# Altium PCB LC_LPF6.PcbDoc
Units mil, origin at the board's own origin, x right, y up, seen from the top; angles counter-clockwise.
Board outline 4630 x 1920 mil, 2 copper layers (Top Layer, Bottom Layer); 7 components, 3 nets, 14 pads, 0 vias.
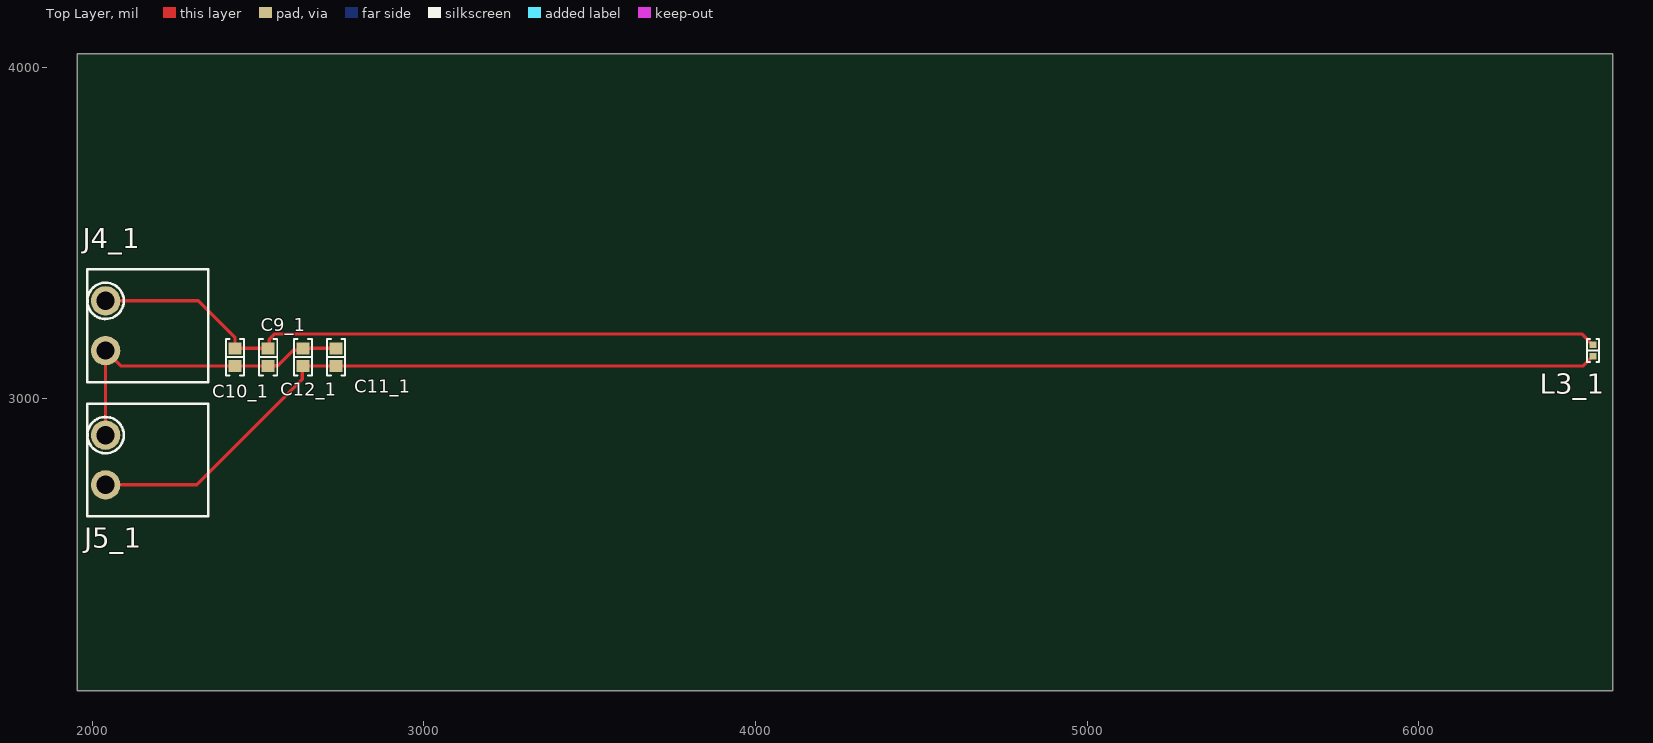
[diagram p0: Top Layer view]
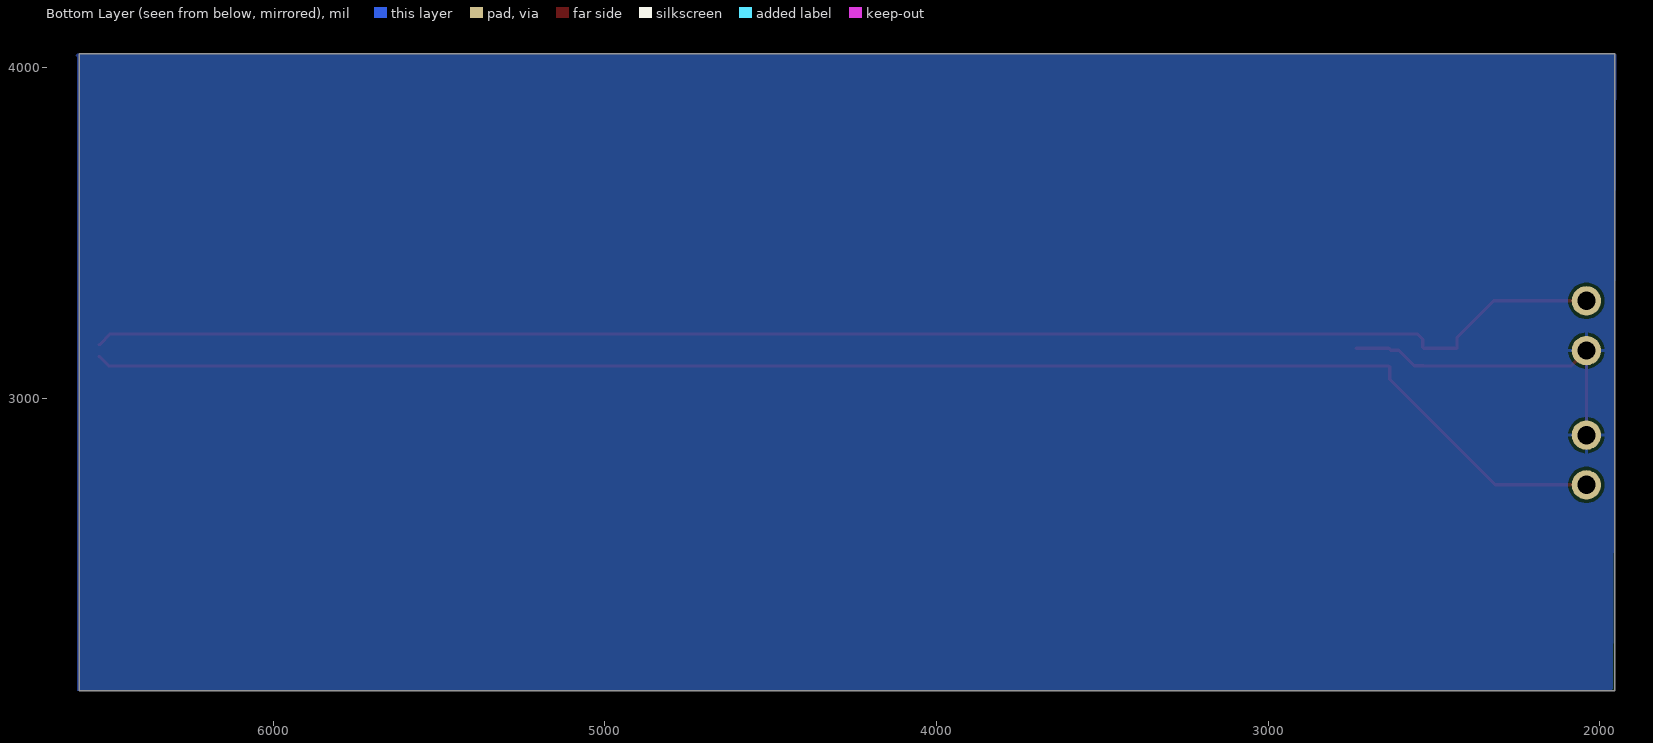
[diagram p1: Bottom Layer view, seen from below]
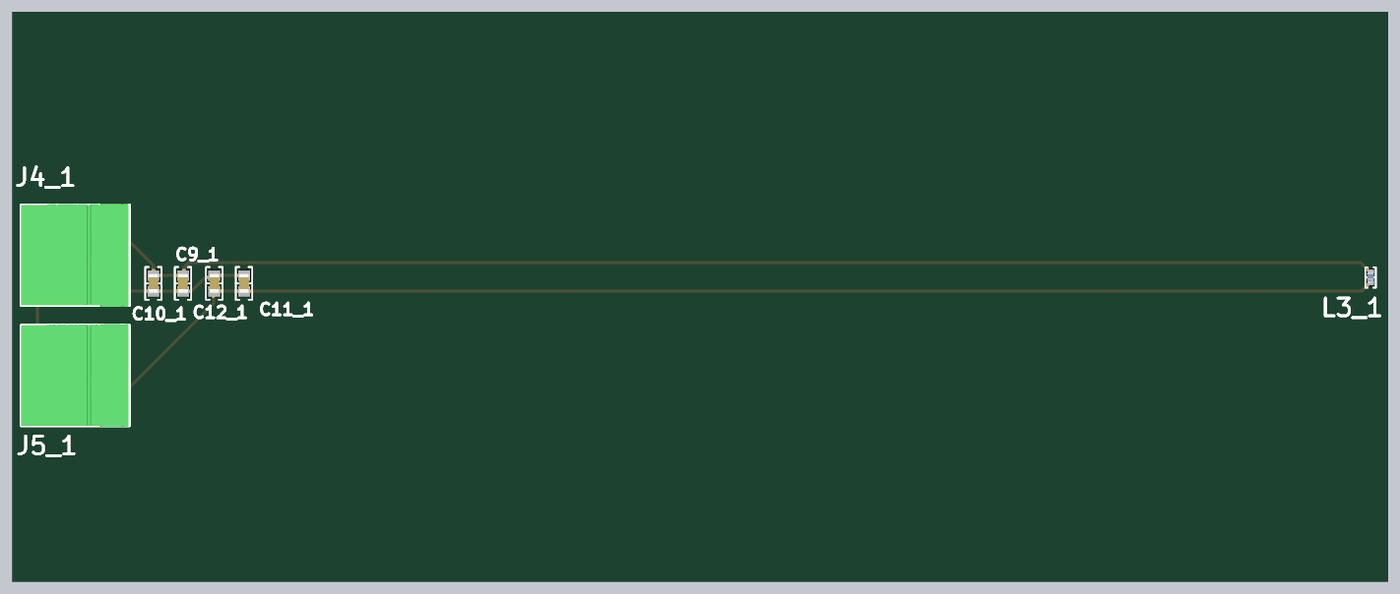
[diagram p2: 3D render of the assembled board from above, using the file's embedded part models]

## Layer stack, top to bottom
Top Solder: solder mask 0.4, Solder Resist, Dk 3.5
Top Layer: signal copper 1.4
Dielectric 1: dielectric 12.6, FR-4, Dk 4.8
Bottom Layer: signal copper 1.4
Bottom Solder: solder mask 0.4, Solder Resist, Dk 3.5

## Board outline
1955,2120 1955,4040 6585,4040 6585,2120

## Design rules (kind name [scope] priority, off if disabled: settings)
Clearance [All] p1: gap=10 ignorepadtopadclearanceinfootprint=FALSE except(0: Arc-Hole Track-Hole SMDPad-Hole THPad-Hole Via-Hole Fill-Hole Poly-Hole Region-Hole Text-Hole)
PolygonConnect [All] p1: connectstyle=Relief reliefconductorwidth=10 reliefentries=4 polygonreliefangle="90 Angle" airgapwidth=10
RoutingVias [All] p1: holewidth=28 width=50 viastyle="Through Hole" minholewidth=28 minwidth=50 maxholewidth=28 maxwidth=50
SolderMaskExpansion [All] p1: expansion=4 istentingtop=FALSE
Width [All] p1: maxlimit=10 minlimit=10 preferedwidth=10
30 further rules are at their usual default settings.

## Components (designator, comment, footprint, x,y, rotation, side; value= is the part's Value field where it differs from the comment)
C9_1 "10 pF" "CAP 0603_1608" 2530,3125 r90 top
C10_1 "1000 pF" "CAP 0603_1608" 2430,3125 r270 top
C11_1 "10 pF" "CAP 0603_1608" 2735,3125 r270 top
C12_1 "1000 pF" "CAP 0603_1608" 2635,3125 r90 top
J4_1 "OQ0232510000G" "FCI 06-381-2PIN" 2170,3220 r270 top
J5_1 "OQ0232510000G" "FCI 06-381-2PIN" 2170,2815 r270 top
L3_1 "160 nH" "IND 0402_1005 RF WW" 6525,3145 r270 top

## Footprints (in the part's own frame and the unit in brackets; to place one, negate y for a bottom-side part, rotate by r counter-clockwise, add the part's x,y. Pads: shape width x height; smd on the part's side, far side on the other; paste and mask are expansions set on the pad)
"CAP 0603_1608" [mm] "Chip Capacitor, 2-Leads, Body 1.60x0.80mm, IPC Medium Density"
  rect 0.9x1 smd: 1(-0.675,0) 2(0.675,0)
  silkscreen extent -1.4,-0.7 1.4,0.7, body extent -0.8,-0.41 0.8,0.41, height 0.82
"FCI 06-381-2PIN" [mm] "FCI Pluggable Terminal Block"
  round 2.25 hole 1.4: 1(-1.905,-3.302) 2(1.905,-3.302)
  silkscreen extent -4.32,-4.7 4.32,4.57, body extent -4.4,-4.7 4.4,4.5, height 7.6
"IND 0402_1005 RF WW" [mm] "Chip Inductor, 2-Leads, Body 1.00x0.50mm, IPC High Density"
  rect 0.48x0.54 smd: 1(-0.44,0) 2(0.44,0)
  silkscreen extent -0.87,-0.45 0.87,0.45, body extent -0.5,-0.29 0.5,0.29, height 0.51

## Part data
C9_1 C11_1: library part AC0603JRNPO0BN100, "CAP CER 10PF 100V C0G/NPO 0603", Device Package="0603 (1608 Metric)", Manufacturer=Yageo, Operating Temperature="-55°C ~ 125°C", Ratings=AEC-Q200, Supplier Part Number 1=311-3083-1-ND, Temperature Coefficient="C0G, NP0", Tolerance=±5%, Voltage - Rated=100V, Applications=Automotive, Capacitance="10 pF", ComponentLink1Description=Datasheet, ComponentLink1URL=http://www.yageo.com/NewPortal/_en/search/productDocs.jsp?YageoPartNumber=AC0603JRNPO0BN100, ComponentLink2Description="DigiKey Link", ComponentLink2URL=https://www.digikey.com/en/products/detail/yageo/AC0603JRNPO0BN100/6643069, lastupdated="04/09/2023 19:08:51", Lifecycle Status=Active, Minimum Order=1, Mounting Type="Surface Mount, MLCC", Package / Case="0603 (1608 Metric)", Packaging=TapeAndReel, Part Number=AC0603JRNPO0BN100, Part Status=Active, PartId=2227, price=0.01, Series=AC, Size / Dimension="0.063\" L x 0.031\" W (1.60mm x 0.80mm)", Supplier 1=DigiKey, Thickness (Max)="0.035\" (0.90mm)"
C10_1 C12_1: library part GCD188R72A102KA01D, "CAP CER 1000PF 100V X7R 0603", Device Package="0603 (1608 Metric)", Manufacturer="Murata Electronics", Operating Temperature="-55°C ~ 125°C", Ratings=AEC-Q200, Supplier Part Number 1=490-17739-1-ND, Temperature Coefficient=X7R, Tolerance=±10%, Voltage - Rated=100V, Applications=Automotive, Capacitance="1000 pF", ComponentLink1Description=Datasheet, ComponentLink1URL=https://search.murata.co.jp/Ceramy/image/img/A01X/G101/ENG/GCD188R72A102KA01-01.pdf, ComponentLink2Description="DigiKey Link", ComponentLink2URL=https://www.digikey.com/en/products/detail/murata-electronics/GCD188R72A102KA01D/4421520, Features="Open Mode", lastupdated="04/09/2023 19:08:51", Lifecycle Status=Active, Minimum Order=1, Mounting Type="Surface Mount, MLCC", Package / Case="0603 (1608 Metric)", Packaging=TapeAndReel, Part Number=GCD188R72A102KA01D, Part Status=Active, PartId=2238, price=0.01, Series=GCD, Size / Dimension="0.063\" L x 0.031\" W (1.60mm x 0.80mm)", Supplier 1=DigiKey, Thickness (Max)="0.031\" (0.80mm)"
J4_1 J5_1: "TERM BLOCK HDR 2POS 90DEG 3.81MM", Color=Green, Current - UL=10A, Manufacturer="Amphenol Anytek", Operating Temperature="-40°C ~ 115°C", Supplier Part Number 1=609-3819-ND, Voltage - UL=300V, ComponentLink1Description=Datasheet, ComponentLink1URL=http://portal.fciconnect.com/Comergent//fci/drawing/oqxx32x100j0g.pdf, ComponentLink2Description="DigiKey Link", ComponentLink2URL=//digikey.com/product-detail/en/amphenol-anytek/OQ0232510000G/609-3819-ND/2261255, Contact Mating Finish=Tin, Header Orientation="90°, Right Angle", lastupdated="16/12/2019 19:14:30", Lifecycle Status=0, Minimum Order=1, Mounting Type="Through Hole", Number of Levels=1, Number of Positions=2, Packaging=Bulk, Part Number=OQ0232510000G, Part Status=Active, Pitch="0.150\" (3.81mm)", Positions Per Level=2, price=0.49, Series=06-381, Supplier 1=DigiKey, Termination Style=Solder, Type="Header, Male Pins, Shrouded (4 Side)"
L3_1: library part LQW15CNR16J00D, "FIXED IND 160NH 480MA 330MOHM SM", Current Rating (Amps)="480 mA", DC Resistance (DCR)="330mOhm Max", Device Package="0402 (1005 Metric)", Frequency - Self Resonant=900MHz, Inductance Frequency - Test="100 MHz", Manufacturer="Murata Electronics", Operating Temperature="-55°C ~ 125°C", Supplier Part Number 1=490-14716-1-ND, Tolerance=±5%, ComponentLink1Description=Datasheet, ComponentLink1URL=https://search.murata.co.jp/Ceramy/image/img/P02/JELF243A-0087.pdf, ComponentLink2Description="DigiKey Link", ComponentLink2URL=https://www.digikey.com/en/products/detail/murata-electronics/LQW15CNR16J00D/4359664, Height - Seated (Max)="0.024\" (0.60mm)", Inductance="160 nH", lastupdated="03/09/2023 20:25:06", Lifecycle Status=Active, Material - Core=Ferrite, Minimum Order=1, Mounting Type="Surface Mount", Package / Case="0402 (1005 Metric)", Packaging=TapeAndReel, Part Number=LQW15CNR16J00D, Part Status=Active, PartId=1, price=0.19, Series=LQW15, Shielding=Unshielded, Size / Dimension="0.039\" L x 0.024\" W (1.00mm x 0.60mm)", Supplier 1=DigiKey, Type="Drum Core, Wirewound"

## Nets (pads, with @x,y where several pads share a name; then routed paths per layer and width w, separated by ;. In a path a pad name is that pad's centre, name@x,y a point inside that pad or via, vN(x,y) a via of type N, cw(c..) or ccw(c..) an arc to the next point about the centre after c; other vN are vias at no path point)
GND: C9_1.1 C10_1.2 C11_1.1 C12_1.2 J4_1.2 J5_1.1 | length 991.3
  Top Layer w10: J5_1.1 J4_1.2 2086.57,3098.43 C10_1.2 C9_1.1 2530.4,3098.83 2558.83,3098.83 2606.17,3146.17 2629.6,3146.17 C12_1.2 C11_1.1
NetC9_1_2: C9_1.2 C10_1.1 J4_1.1 L3_1.1 | length 4609.2
  Top Layer w10: J4_1.1 2320,3295 2430,3185 C10_1.1 C9_1.2 2533.43,3155.01 2533.43,3178.43 2550,3195 6491.14,3195 6522.91,3163.24 6524.09,3163.24 L3_1.1
NetC11_1_2: C11_1.2 C12_1.1 J5_1.2 L3_1.2 | length 4668.1
  Top Layer w10: J5_1.2 2315,2740 2633.03,3058.03 2633.03,3096.46 C12_1.1 C11_1.2 6494.57,3098.43 6522.91,3126.76 6524.09,3126.76 L3_1.2

## Polygon pours and split planes (outlines as drawn)
GND on Bottom Layer "GND_L02_P000" (solid, pour order 0): 1960,2125 1965,2120 6590,2120 6590,4030 6595,4035 6590,4040 1950,4040